# EAGLE board atto84-Panel (EAGLE 7.7.0), part 1 of 2
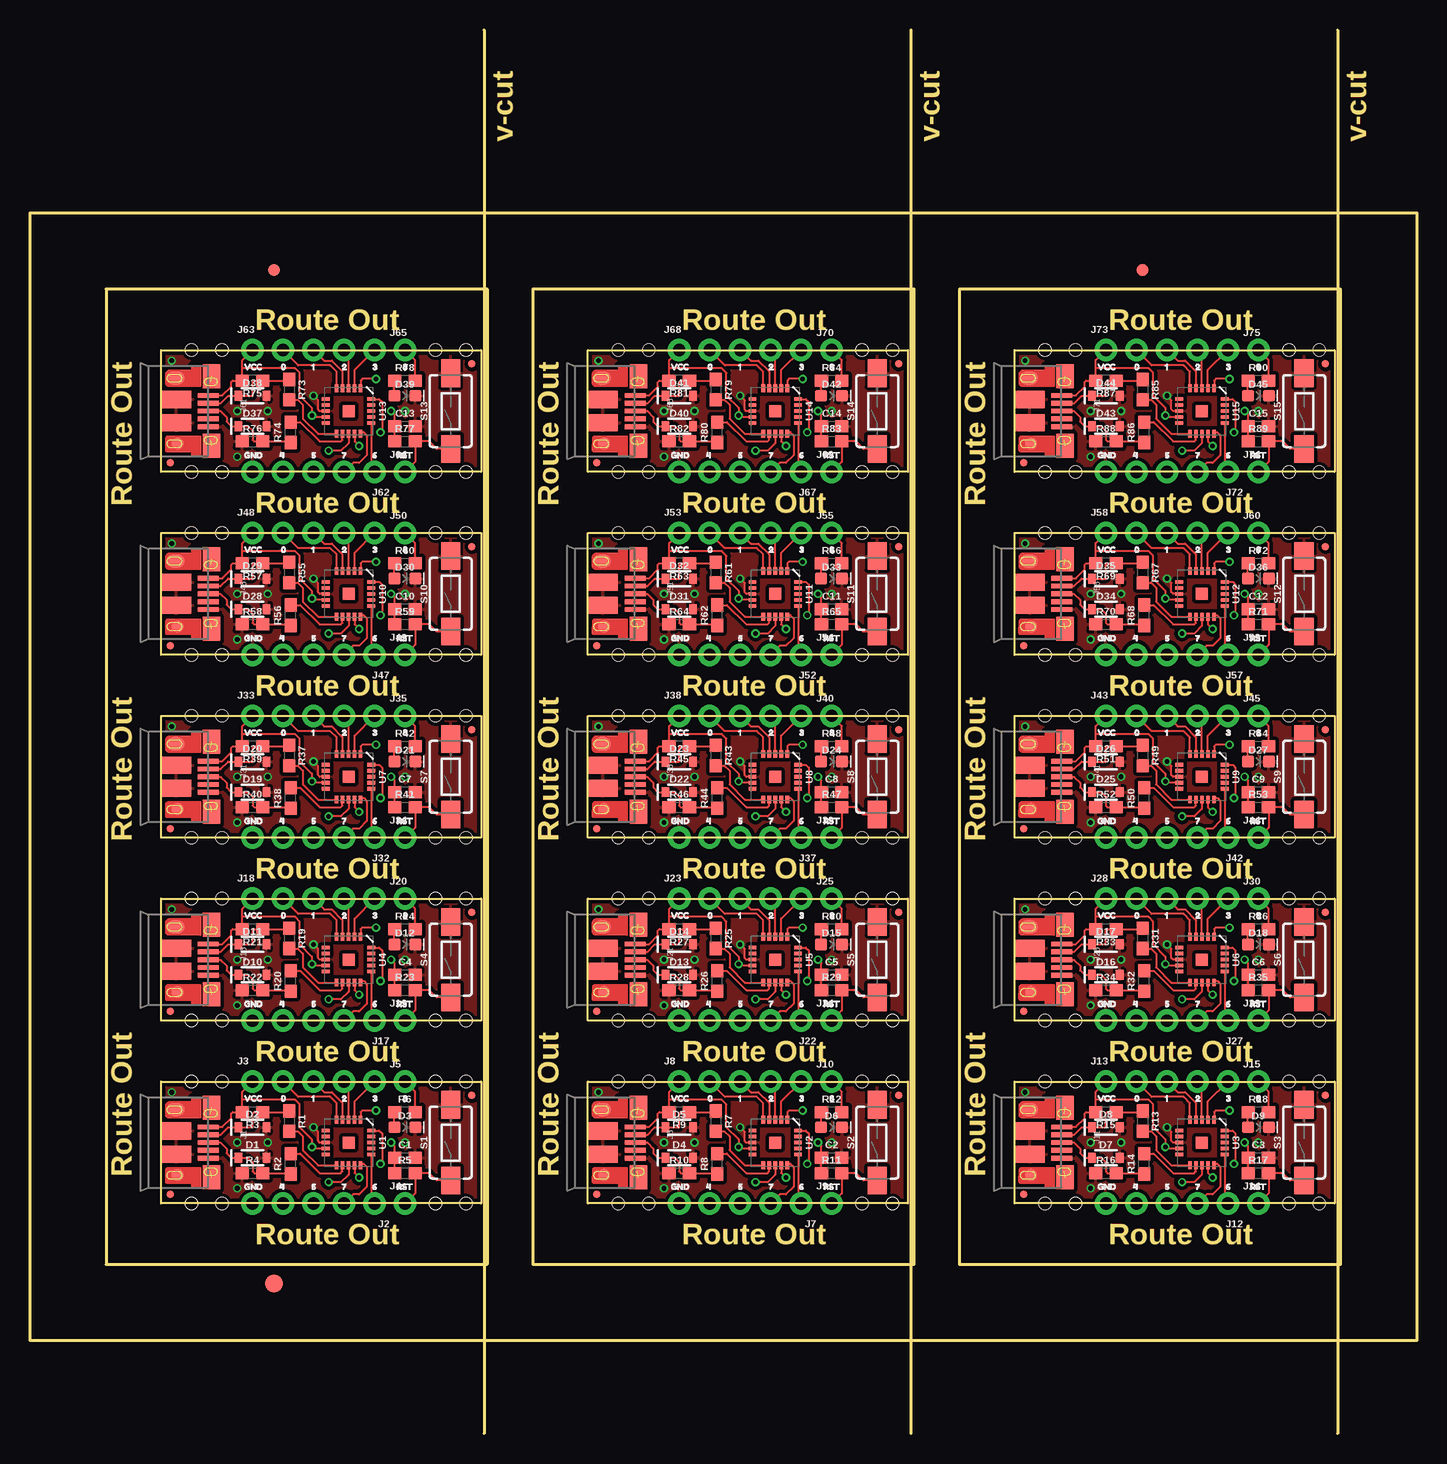
[diagram p0: board, top side]
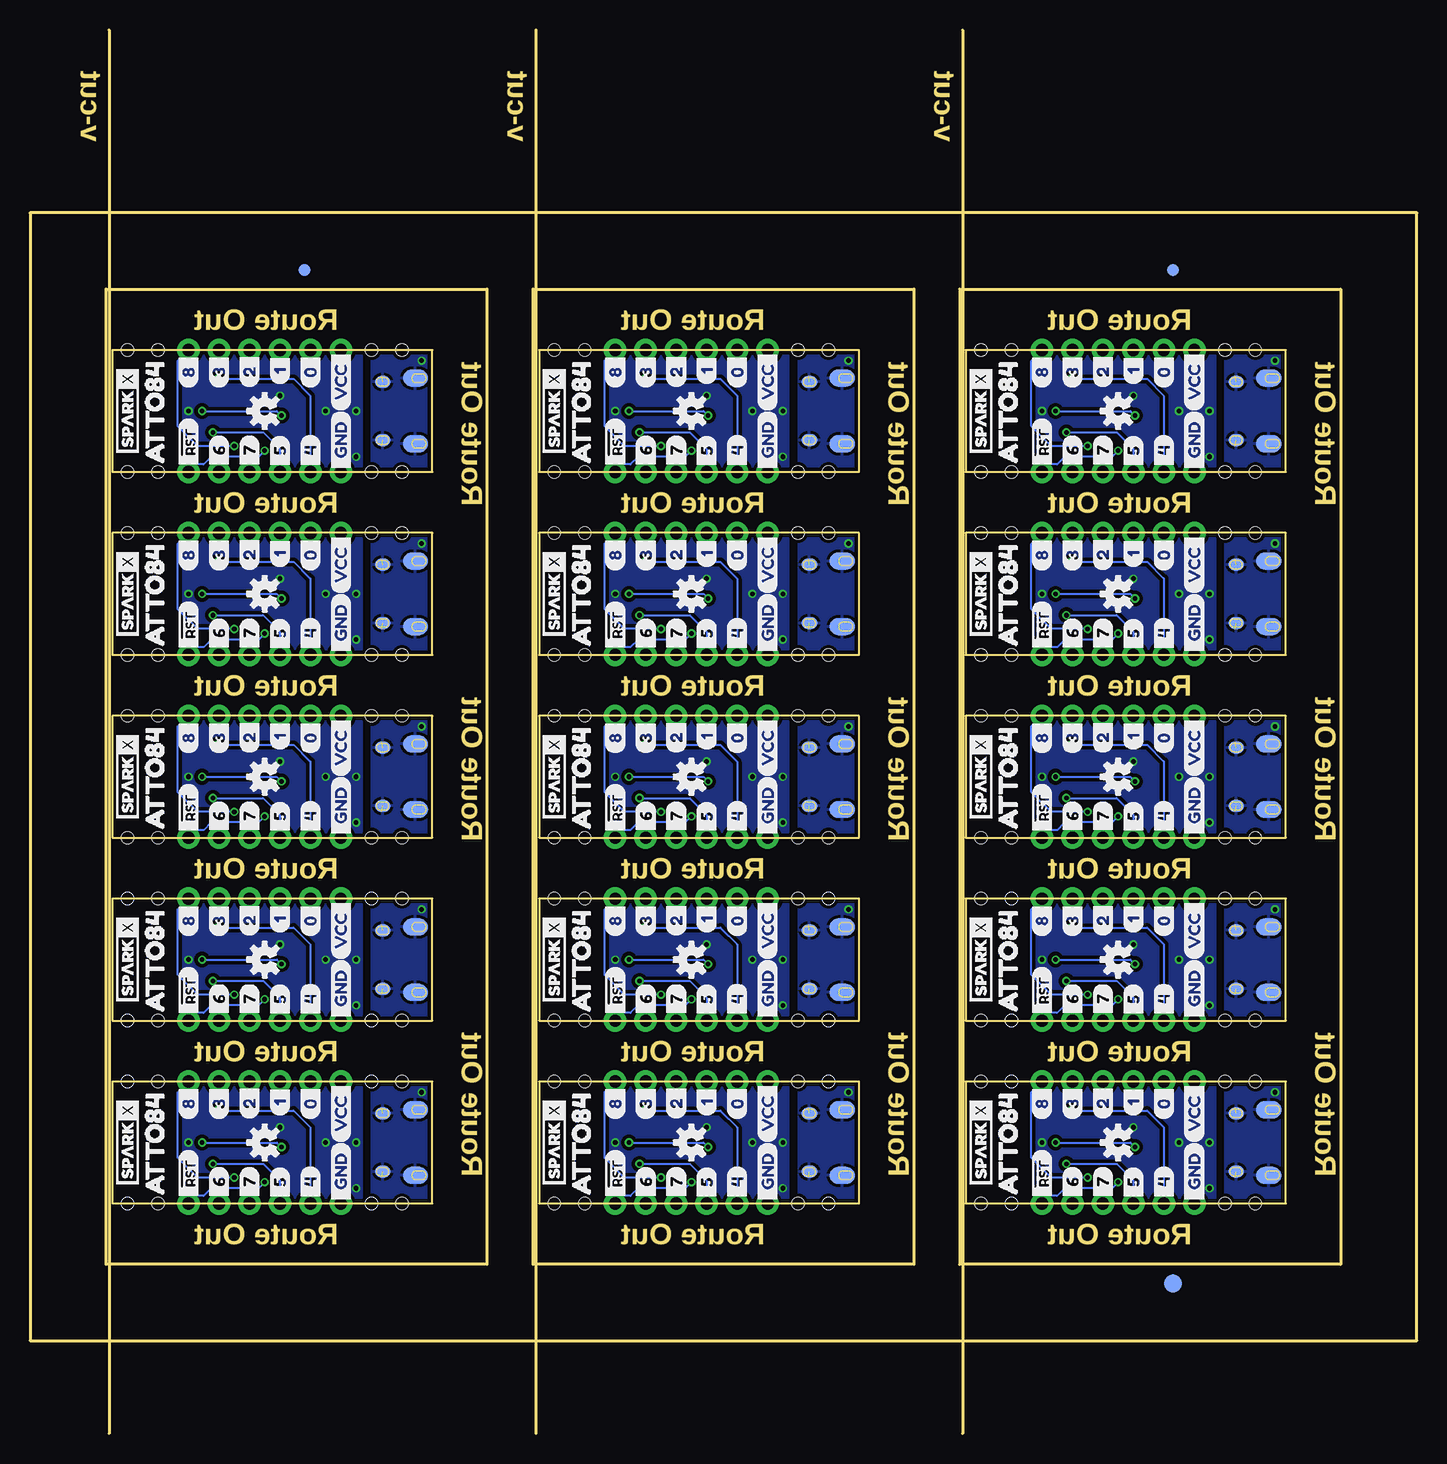
[diagram p1: board, bottom side, seen from below]

Size 115.57 x 116.97 mm. Coordinates in mm from the lower left corner, seen from the top.
Outline: 37.85,116.97 37.85,0
Outline: 73.41,116.97 73.41,0
Outline: 108.97,116.97 108.97,0
Outline: 10.92,19.18 10.92,29.34 37.59,29.34 37.59,19.18 10.92,19.18
Outline: 46.48,19.18 46.48,29.34 73.15,29.34 73.15,19.18 46.48,19.18
Outline: 82.04,19.18 82.04,29.34 108.71,29.34 108.71,19.18 82.04,19.18
Outline: 10.92,34.42 10.92,44.58 37.59,44.58 37.59,34.42 10.92,34.42
Outline: 46.48,34.42 46.48,44.58 73.15,44.58 73.15,34.42 46.48,34.42
Outline: 82.04,34.42 82.04,44.58 108.71,44.58 108.71,34.42 82.04,34.42
Outline: 10.92,49.66 10.92,59.82 37.59,59.82 37.59,49.66 10.92,49.66
Outline: 46.48,49.66 46.48,59.82 73.15,59.82 73.15,49.66 46.48,49.66
Outline: 82.04,49.66 82.04,59.82 108.71,59.82 108.71,49.66 82.04,49.66
Outline: 10.92,64.9 10.92,75.06 37.59,75.06 37.59,64.9 10.92,64.9
Outline: 46.48,64.9 46.48,75.06 73.15,75.06 73.15,64.9 46.48,64.9
Outline: 82.04,64.9 82.04,75.06 108.71,75.06 108.71,64.9 82.04,64.9
Outline: 10.92,80.14 10.92,90.3 37.59,90.3 37.59,80.14 10.92,80.14
Outline: 46.48,80.14 46.48,90.3 73.15,90.3 73.15,80.14 46.48,80.14
Outline: 82.04,80.14 82.04,90.3 108.71,90.3 108.71,80.14 82.04,80.14
Outline: 6.35,14.1 38.1,14.1 38.1,95.38 6.35,95.38 6.35,14.1
Outline: 41.91,14.1 73.66,14.1 73.66,95.38 41.91,95.38 41.91,14.1
Outline: 77.47,14.1 109.22,14.1 109.22,95.38 77.47,95.38 77.47,14.1
Outline: 115.57,7.75 0,7.75 0,101.73 115.57,101.73 115.57,7.75
Copper layers (1*16): Top 0.035mm / dielectric 1.5mm / Bottom 0.035mm
Design rules "SparkFun-2-layer-PCBWay-LIMIT": minimum track width 6mil, minimum drill 0.3mm, track to track 6mil, track to pad 6mil, pad to pad 6mil, via to via 6mil, smd to smd 6mil, copper to edge 6mil, drill to drill 6mil, minimum pad ring 6mil, minimum via ring 6mil, stop-mask expansion 4mil, vias tented up to drill 25mil, thermal gap 10mil
Holes 1.02 mm at 16,29.34 13.46,29.34 13.46,19.18 16,19.18 33.78,19.18 36.32,19.18 36.32,29.34 33.78,29.34 51.56,29.34 49.02,29.34 49.02,19.18 51.56,19.18 69.34,19.18 71.88,19.18 71.88,29.34 69.34,29.34 87.12,29.34 84.58,29.34 84.58,19.18 87.12,19.18 104.9,19.18 107.44,19.18 107.44,29.34 104.9,29.34 16,44.58 13.46,44.58 13.46,34.42 16,34.42 33.78,34.42 36.32,34.42 36.32,44.58 33.78,44.58 51.56,44.58 49.02,44.58 49.02,34.42 51.56,34.42 69.34,34.42 71.88,34.42 71.88,44.58 69.34,44.58 87.12,44.58 84.58,44.58 84.58,34.42 87.12,34.42 104.9,34.42 107.44,34.42 107.44,44.58 104.9,44.58 16,59.82 13.46,59.82 13.46,49.66 16,49.66 33.78,49.66 36.32,49.66 36.32,59.82 33.78,59.82 51.56,59.82 49.02,59.82 49.02,49.66 51.56,49.66 69.34,49.66 71.88,49.66 71.88,59.82 69.34,59.82 87.12,59.82 84.58,59.82 84.58,49.66 87.12,49.66 104.9,49.66 107.44,49.66 107.44,59.82 104.9,59.82 16,75.06 13.46,75.06 13.46,64.9 16,64.9 33.78,64.9 36.32,64.9 36.32,75.06 33.78,75.06 51.56,75.06 49.02,75.06 49.02,64.9 51.56,64.9 69.34,64.9 71.88,64.9 71.88,75.06 69.34,75.06 87.12,75.06 84.58,75.06 84.58,64.9 87.12,64.9 104.9,64.9 107.44,64.9 107.44,75.06 104.9,75.06 16,90.3 13.46,90.3 13.46,80.14 16,80.14 33.78,80.14 36.32,80.14 36.32,90.3 33.78,90.3 51.56,90.3 49.02,90.3 49.02,80.14 51.56,80.14 69.34,80.14 71.88,80.14 71.88,90.3 69.34,90.3 87.12,90.3 84.58,90.3 84.58,80.14 87.12,80.14 104.9,80.14 107.44,80.14 107.44,90.3 104.9,90.3

## Footprints (pad centres in the part's own frame; a part is rotated, then mirrored left to right if it is on the bottom)
0603 = smd 1.1 x 1: 1 -0.85,0; 2 0.85,0
SOD-323 = smd 0.63 x 0.83: A 1.15,0; C -1.15,0
LED-0603 = smd 1 x 1: A -0.877,0; C 0.877,0
FIDUCIAL-1X2 = smd 1 x 1: 1 0,0
FIDUCIAL-1.5X3 = smd 1.5 x 1.5: 1 0,0
FIDUCIAL-MICRO = smd 0.635 x 0.635: 1 0,0
USB-MICROB-PTH-MILL = smd 0.4 x 1.75: D+ 0,0; D- -0.65,0; GND 1.3,0; ID 0.65,0; VBUS -1.3,0 | smd 2 x 1.46: SHIELD -2.9,0.275; SHIELD2 2.9,0.275 | smd 1.425 x 2.5: SHIELD3 -0.963,-2.675; SHIELD4 0.963,-2.675 | smd 1.4 x 2.1 bottom: SHIELD5 -2.731,-2.531; SHIELD7 2.729,-2.531 | smd 1 x 1: SHIELD6 2.7,-2.575 | smd 1.1 x 1.5: SHIELD8 -2.731,-2.731 | smd 1 x 1.3 bottom: SHIELD9 -2.43,0.195; SHIELD10 2.43,0.195
1X05_NO_SILK = drill 1.016 pad 1.88: 1 0,0; 2 2.54,0; 3 5.08,0; 4 7.62,0; 5 10.16,0
1X01_NO_SILK = drill 1.016 pad 1.88: 1 0,0
TACTILE_SWITCH_SMD_6.0X3.5MM = smd 2.3 x 1.6: 1 -3.15,0; 2 3.15,0
QFN20 = smd 1 x 1: 0 0,0 | smd 0.65 x 0.3: 1 -1.9,1; 2 -1.9,0.5; 3 -1.9,0; 4 -1.9,-0.5; 5 -1.9,-1; 11 1.9,-1; 12 1.9,-0.5; 13 1.9,0; 14 1.9,0.5; 15 1.9,1 | smd 0.3 x 0.65: 6 -1,-1.9; 7 -0.5,-1.9; 8 0,-1.9; 9 0.5,-1.9; 10 1,-1.9; 16 1,1.9; 17 0.5,1.9; 18 0,1.9; 19 -0.5,1.9; 20 -1,1.9

## Placement (x,y rotation side)
C1  0.1uF  [0603]  31.24,22.99 0 top
C2  0.1uF  [0603]  66.8,22.99 0 top
C3  0.1uF  [0603]  102.36,22.99 0 top
C4  0.1uF  [0603]  31.24,38.23 0 top
C5  0.1uF  [0603]  66.8,38.23 0 top
C6  0.1uF  [0603]  102.36,38.23 0 top
C7  0.1uF  [0603]  31.24,53.47 0 top
C8  0.1uF  [0603]  66.8,53.47 0 top
C9  0.1uF  [0603]  102.36,53.47 0 top
C10  0.1uF  [0603]  31.24,68.71 0 top
C11  0.1uF  [0603]  66.8,68.71 0 top
C12  0.1uF  [0603]  102.36,68.71 0 top
C13  0.1uF  [0603]  31.24,83.95 0 top
C14  0.1uF  [0603]  66.8,83.95 0 top
C15  0.1uF  [0603]  102.36,83.95 0 top
D1  3.6V  [SOD-323]  18.54,22.99 0 top
D2  3.6V  [SOD-323]  18.54,25.53 0 top
D3  BLUE  [LED-0603]  31.24,25.53 0 top
D4  3.6V  [SOD-323]  54.1,22.99 0 top
D5  3.6V  [SOD-323]  54.1,25.53 0 top
D6  BLUE  [LED-0603]  66.8,25.53 0 top
D7  3.6V  [SOD-323]  89.66,22.99 0 top
D8  3.6V  [SOD-323]  89.66,25.53 0 top
D9  BLUE  [LED-0603]  102.36,25.53 0 top
D10  3.6V  [SOD-323]  18.54,38.23 0 top
D11  3.6V  [SOD-323]  18.54,40.77 0 top
D12  BLUE  [LED-0603]  31.24,40.77 0 top
D13  3.6V  [SOD-323]  54.1,38.23 0 top
D14  3.6V  [SOD-323]  54.1,40.77 0 top
D15  BLUE  [LED-0603]  66.8,40.77 0 top
D16  3.6V  [SOD-323]  89.66,38.23 0 top
D17  3.6V  [SOD-323]  89.66,40.77 0 top
D18  BLUE  [LED-0603]  102.36,40.77 0 top
D19  3.6V  [SOD-323]  18.54,53.47 0 top
D20  3.6V  [SOD-323]  18.54,56.01 0 top
D21  BLUE  [LED-0603]  31.24,56.01 0 top
D22  3.6V  [SOD-323]  54.1,53.47 0 top
D23  3.6V  [SOD-323]  54.1,56.01 0 top
D24  BLUE  [LED-0603]  66.8,56.01 0 top
D25  3.6V  [SOD-323]  89.66,53.47 0 top
D26  3.6V  [SOD-323]  89.66,56.01 0 top
D27  BLUE  [LED-0603]  102.36,56.01 0 top
D28  3.6V  [SOD-323]  18.54,68.71 0 top
D29  3.6V  [SOD-323]  18.54,71.25 0 top
D30  BLUE  [LED-0603]  31.24,71.25 0 top
D31  3.6V  [SOD-323]  54.1,68.71 0 top
D32  3.6V  [SOD-323]  54.1,71.25 0 top
D33  BLUE  [LED-0603]  66.8,71.25 0 top
D34  3.6V  [SOD-323]  89.66,68.71 0 top
D35  3.6V  [SOD-323]  89.66,71.25 0 top
D36  BLUE  [LED-0603]  102.36,71.25 0 top
D37  3.6V  [SOD-323]  18.54,83.95 0 top
D38  3.6V  [SOD-323]  18.54,86.49 0 top
D39  BLUE  [LED-0603]  31.24,86.49 0 top
D40  3.6V  [SOD-323]  54.1,83.95 0 top
D41  3.6V  [SOD-323]  54.1,86.49 0 top
D42  BLUE  [LED-0603]  66.8,86.49 0 top
D43  3.6V  [SOD-323]  89.66,83.95 0 top
D44  3.6V  [SOD-323]  89.66,86.49 0 top
D45  BLUE  [LED-0603]  102.36,86.49 0 top
E$1  [FIDUCIAL-1X2]  20.32,96.96 0 top
E$2  [FIDUCIAL-1X2]  20.32,96.96 0 bottom
E$3  [FIDUCIAL-1X2]  92.71,96.96 0 top
E$4  [FIDUCIAL-1X2]  92.71,96.96 0 bottom
E$5  [FIDUCIAL-1.5X3]  20.32,12.51 0 top
E$6  [FIDUCIAL-1.5X3]  20.32,12.51 0 bottom
FD1  FIDUCIALUFIDUCIAL  [FIDUCIAL-MICRO]  36.83,28.19 0 top
FD2  FIDUCIALUFIDUCIAL  [FIDUCIAL-MICRO]  11.68,19.94 0 top
FD3  FIDUCIALUFIDUCIAL  [FIDUCIAL-MICRO]  72.39,28.19 0 top
FD4  FIDUCIALUFIDUCIAL  [FIDUCIAL-MICRO]  47.24,19.94 0 top
FD5  FIDUCIALUFIDUCIAL  [FIDUCIAL-MICRO]  107.95,28.19 0 top
FD6  FIDUCIALUFIDUCIAL  [FIDUCIAL-MICRO]  82.8,19.94 0 top
FD7  FIDUCIALUFIDUCIAL  [FIDUCIAL-MICRO]  36.83,43.43 0 top
FD8  FIDUCIALUFIDUCIAL  [FIDUCIAL-MICRO]  11.68,35.18 0 top
FD9  FIDUCIALUFIDUCIAL  [FIDUCIAL-MICRO]  72.39,43.43 0 top
FD10  FIDUCIALUFIDUCIAL  [FIDUCIAL-MICRO]  47.24,35.18 0 top
FD11  FIDUCIALUFIDUCIAL  [FIDUCIAL-MICRO]  107.95,43.43 0 top
FD12  FIDUCIALUFIDUCIAL  [FIDUCIAL-MICRO]  82.8,35.18 0 top
FD13  FIDUCIALUFIDUCIAL  [FIDUCIAL-MICRO]  36.83,58.67 0 top
FD14  FIDUCIALUFIDUCIAL  [FIDUCIAL-MICRO]  11.68,50.42 0 top
FD15  FIDUCIALUFIDUCIAL  [FIDUCIAL-MICRO]  72.39,58.67 0 top
FD16  FIDUCIALUFIDUCIAL  [FIDUCIAL-MICRO]  47.24,50.42 0 top
FD17  FIDUCIALUFIDUCIAL  [FIDUCIAL-MICRO]  107.95,58.67 0 top
FD18  FIDUCIALUFIDUCIAL  [FIDUCIAL-MICRO]  82.8,50.42 0 top
FD19  FIDUCIALUFIDUCIAL  [FIDUCIAL-MICRO]  36.83,73.91 0 top
FD20  FIDUCIALUFIDUCIAL  [FIDUCIAL-MICRO]  11.68,65.66 0 top
FD21  FIDUCIALUFIDUCIAL  [FIDUCIAL-MICRO]  72.39,73.91 0 top
FD22  FIDUCIALUFIDUCIAL  [FIDUCIAL-MICRO]  47.24,65.66 0 top
FD23  FIDUCIALUFIDUCIAL  [FIDUCIAL-MICRO]  107.95,73.91 0 top
FD24  FIDUCIALUFIDUCIAL  [FIDUCIAL-MICRO]  82.8,65.66 0 top
FD25  FIDUCIALUFIDUCIAL  [FIDUCIAL-MICRO]  36.83,89.15 0 top
FD26  FIDUCIALUFIDUCIAL  [FIDUCIAL-MICRO]  11.68,80.9 0 top
FD27  FIDUCIALUFIDUCIAL  [FIDUCIAL-MICRO]  72.39,89.15 0 top
FD28  FIDUCIALUFIDUCIAL  [FIDUCIAL-MICRO]  47.24,80.9 0 top
FD29  FIDUCIALUFIDUCIAL  [FIDUCIAL-MICRO]  107.95,89.15 0 top
FD30  FIDUCIALUFIDUCIAL  [FIDUCIAL-MICRO]  82.8,80.9 0 top
J1  [USB-MICROB-PTH-MILL]  14.86,24.26 270 top
J2  [1X05_NO_SILK]  28.7,19.18 180 top
J3  [1X05_NO_SILK]  18.54,29.34 0 top
J4  [1X01_NO_SILK]  31.24,19.18 0 top
J5  [1X01_NO_SILK]  31.24,29.34 0 top
J6  [USB-MICROB-PTH-MILL]  50.42,24.26 270 top
J7  [1X05_NO_SILK]  64.26,19.18 180 top
J8  [1X05_NO_SILK]  54.1,29.34 0 top
J9  [1X01_NO_SILK]  66.8,19.18 0 top
J10  [1X01_NO_SILK]  66.8,29.34 0 top
J11  [USB-MICROB-PTH-MILL]  85.98,24.26 270 top
J12  [1X05_NO_SILK]  99.82,19.18 180 top
J13  [1X05_NO_SILK]  89.66,29.34 0 top
J14  [1X01_NO_SILK]  102.36,19.18 0 top
J15  [1X01_NO_SILK]  102.36,29.34 0 top
J16  [USB-MICROB-PTH-MILL]  14.86,39.5 270 top
J17  [1X05_NO_SILK]  28.7,34.42 180 top
J18  [1X05_NO_SILK]  18.54,44.58 0 top
J19  [1X01_NO_SILK]  31.24,34.42 0 top
J20  [1X01_NO_SILK]  31.24,44.58 0 top
J21  [USB-MICROB-PTH-MILL]  50.42,39.5 270 top
J22  [1X05_NO_SILK]  64.26,34.42 180 top
J23  [1X05_NO_SILK]  54.1,44.58 0 top
J24  [1X01_NO_SILK]  66.8,34.42 0 top
J25  [1X01_NO_SILK]  66.8,44.58 0 top
J26  [USB-MICROB-PTH-MILL]  85.98,39.5 270 top
J27  [1X05_NO_SILK]  99.82,34.42 180 top
J28  [1X05_NO_SILK]  89.66,44.58 0 top
J29  [1X01_NO_SILK]  102.36,34.42 0 top
J30  [1X01_NO_SILK]  102.36,44.58 0 top
J31  [USB-MICROB-PTH-MILL]  14.86,54.74 270 top
J32  [1X05_NO_SILK]  28.7,49.66 180 top
J33  [1X05_NO_SILK]  18.54,59.82 0 top
J34  [1X01_NO_SILK]  31.24,49.66 0 top
J35  [1X01_NO_SILK]  31.24,59.82 0 top
J36  [USB-MICROB-PTH-MILL]  50.42,54.74 270 top
J37  [1X05_NO_SILK]  64.26,49.66 180 top
J38  [1X05_NO_SILK]  54.1,59.82 0 top
J39  [1X01_NO_SILK]  66.8,49.66 0 top
J40  [1X01_NO_SILK]  66.8,59.82 0 top
J41  [USB-MICROB-PTH-MILL]  85.98,54.74 270 top
J42  [1X05_NO_SILK]  99.82,49.66 180 top
J43  [1X05_NO_SILK]  89.66,59.82 0 top
J44  [1X01_NO_SILK]  102.36,49.66 0 top
J45  [1X01_NO_SILK]  102.36,59.82 0 top
J46  [USB-MICROB-PTH-MILL]  14.86,69.98 270 top
J47  [1X05_NO_SILK]  28.7,64.9 180 top
J48  [1X05_NO_SILK]  18.54,75.06 0 top
J49  [1X01_NO_SILK]  31.24,64.9 0 top
J50  [1X01_NO_SILK]  31.24,75.06 0 top
J51  [USB-MICROB-PTH-MILL]  50.42,69.98 270 top
J52  [1X05_NO_SILK]  64.26,64.9 180 top
J53  [1X05_NO_SILK]  54.1,75.06 0 top
J54  [1X01_NO_SILK]  66.8,64.9 0 top
J55  [1X01_NO_SILK]  66.8,75.06 0 top
J56  [USB-MICROB-PTH-MILL]  85.98,69.98 270 top
J57  [1X05_NO_SILK]  99.82,64.9 180 top
J58  [1X05_NO_SILK]  89.66,75.06 0 top
J59  [1X01_NO_SILK]  102.36,64.9 0 top
J60  [1X01_NO_SILK]  102.36,75.06 0 top
J61  [USB-MICROB-PTH-MILL]  14.86,85.22 270 top
J62  [1X05_NO_SILK]  28.7,80.14 180 top
J63  [1X05_NO_SILK]  18.54,90.3 0 top
J64  [1X01_NO_SILK]  31.24,80.14 0 top
J65  [1X01_NO_SILK]  31.24,90.3 0 top
J66  [USB-MICROB-PTH-MILL]  50.42,85.22 270 top
J67  [1X05_NO_SILK]  64.26,80.14 180 top
J68  [1X05_NO_SILK]  54.1,90.3 0 top
J69  [1X01_NO_SILK]  66.8,80.14 0 top
J70  [1X01_NO_SILK]  66.8,90.3 0 top
J71  [USB-MICROB-PTH-MILL]  85.98,85.22 270 top
J72  [1X05_NO_SILK]  99.82,80.14 180 top
J73  [1X05_NO_SILK]  89.66,90.3 0 top
J74  [1X01_NO_SILK]  102.36,80.14 0 top
J75  [1X01_NO_SILK]  102.36,90.3 0 top
R1  68OHM-0603-1/10W-1%  [0603]  21.59,26.04 270 top
R2  68OHM-0603-1/10W-1%  [0603]  21.72,22.48 90 top
R3  1.5k  [0603]  18.54,26.8 180 top
R4  1M  [0603]  18.54,21.72 0 top
R5  10k  [0603]  31.24,21.72 0 top
R6  1k  [0603]  31.24,26.8 0 top
R7  68OHM-0603-1/10W-1%  [0603]  57.15,26.04 270 top
R8  68OHM-0603-1/10W-1%  [0603]  57.28,22.48 90 top
R9  1.5k  [0603]  54.1,26.8 180 top
R10  1M  [0603]  54.1,21.72 0 top
R11  10k  [0603]  66.8,21.72 0 top
R12  1k  [0603]  66.8,26.8 0 top
R13  68OHM-0603-1/10W-1%  [0603]  92.71,26.04 270 top
R14  68OHM-0603-1/10W-1%  [0603]  92.84,22.48 90 top
R15  1.5k  [0603]  89.66,26.8 180 top
R16  1M  [0603]  89.66,21.72 0 top
R17  10k  [0603]  102.36,21.72 0 top
R18  1k  [0603]  102.36,26.8 0 top
R19  68OHM-0603-1/10W-1%  [0603]  21.59,41.27 270 top
R20  68OHM-0603-1/10W-1%  [0603]  21.72,37.72 90 top
R21  1.5k  [0603]  18.54,42.04 180 top
R22  1M  [0603]  18.54,36.96 0 top
R23  10k  [0603]  31.24,36.96 0 top
R24  1k  [0603]  31.24,42.04 0 top
R25  68OHM-0603-1/10W-1%  [0603]  57.15,41.27 270 top
R26  68OHM-0603-1/10W-1%  [0603]  57.28,37.72 90 top
R27  1.5k  [0603]  54.1,42.04 180 top
R28  1M  [0603]  54.1,36.96 0 top
R29  10k  [0603]  66.8,36.96 0 top
R30  1k  [0603]  66.8,42.04 0 top
R31  68OHM-0603-1/10W-1%  [0603]  92.71,41.27 270 top
R32  68OHM-0603-1/10W-1%  [0603]  92.84,37.72 90 top
R33  1.5k  [0603]  89.66,42.04 180 top
R34  1M  [0603]  89.66,36.96 0 top
R35  10k  [0603]  102.36,36.96 0 top
R36  1k  [0603]  102.36,42.04 0 top
R37  68OHM-0603-1/10W-1%  [0603]  21.59,56.52 270 top
R38  68OHM-0603-1/10W-1%  [0603]  21.72,52.96 90 top
R39  1.5k  [0603]  18.54,57.28 180 top
R40  1M  [0603]  18.54,52.2 0 top
R41  10k  [0603]  31.24,52.2 0 top
R42  1k  [0603]  31.24,57.28 0 top
R43  68OHM-0603-1/10W-1%  [0603]  57.15,56.52 270 top
R44  68OHM-0603-1/10W-1%  [0603]  57.28,52.96 90 top
R45  1.5k  [0603]  54.1,57.28 180 top
R46  1M  [0603]  54.1,52.2 0 top
R47  10k  [0603]  66.8,52.2 0 top
R48  1k  [0603]  66.8,57.28 0 top
R49  68OHM-0603-1/10W-1%  [0603]  92.71,56.52 270 top
R50  68OHM-0603-1/10W-1%  [0603]  92.84,52.96 90 top
R51  1.5k  [0603]  89.66,57.28 180 top
R52  1M  [0603]  89.66,52.2 0 top
R53  10k  [0603]  102.36,52.2 0 top
R54  1k  [0603]  102.36,57.28 0 top
R55  68OHM-0603-1/10W-1%  [0603]  21.59,71.75 270 top
R56  68OHM-0603-1/10W-1%  [0603]  21.72,68.2 90 top
R57  1.5k  [0603]  18.54,72.52 180 top
R58  1M  [0603]  18.54,67.44 0 top
R59  10k  [0603]  31.24,67.44 0 top
R60  1k  [0603]  31.24,72.52 0 top
R61  68OHM-0603-1/10W-1%  [0603]  57.15,71.75 270 top
R62  68OHM-0603-1/10W-1%  [0603]  57.28,68.2 90 top
R63  1.5k  [0603]  54.1,72.52 180 top
R64  1M  [0603]  54.1,67.44 0 top
R65  10k  [0603]  66.8,67.44 0 top
R66  1k  [0603]  66.8,72.52 0 top
R67  68OHM-0603-1/10W-1%  [0603]  92.71,71.75 270 top
R68  68OHM-0603-1/10W-1%  [0603]  92.84,68.2 90 top
R69  1.5k  [0603]  89.66,72.52 180 top
R70  1M  [0603]  89.66,67.44 0 top
R71  10k  [0603]  102.36,67.44 0 top
R72  1k  [0603]  102.36,72.52 0 top
R73  68OHM-0603-1/10W-1%  [0603]  21.59,87 270 top
R74  68OHM-0603-1/10W-1%  [0603]  21.72,83.44 90 top
R75  1.5k  [0603]  18.54,87.76 180 top
R76  1M  [0603]  18.54,82.68 0 top
R77  10k  [0603]  31.24,82.68 0 top
R78  1k  [0603]  31.24,87.76 0 top
R79  68OHM-0603-1/10W-1%  [0603]  57.15,87 270 top
R80  68OHM-0603-1/10W-1%  [0603]  57.28,83.44 90 top
R81  1.5k  [0603]  54.1,87.76 180 top
R82  1M  [0603]  54.1,82.68 0 top
R83  10k  [0603]  66.8,82.68 0 top
R84  1k  [0603]  66.8,87.76 0 top
R85  68OHM-0603-1/10W-1%  [0603]  92.71,87 270 top
R86  68OHM-0603-1/10W-1%  [0603]  92.84,83.44 90 top
R87  1.5k  [0603]  89.66,87.76 180 top
R88  1M  [0603]  89.66,82.68 0 top
R89  10k  [0603]  102.36,82.68 0 top
R90  1k  [0603]  102.36,87.76 0 top
S1  [TACTILE_SWITCH_SMD_6.0X3.5MM]  35.05,24.26 90 top
S2  [TACTILE_SWITCH_SMD_6.0X3.5MM]  70.61,24.26 90 top
S3  [TACTILE_SWITCH_SMD_6.0X3.5MM]  106.17,24.26 90 top
S4  [TACTILE_SWITCH_SMD_6.0X3.5MM]  35.05,39.5 90 top
S5  [TACTILE_SWITCH_SMD_6.0X3.5MM]  70.61,39.5 90 top
S6  [TACTILE_SWITCH_SMD_6.0X3.5MM]  106.17,39.5 90 top
S7  [TACTILE_SWITCH_SMD_6.0X3.5MM]  35.05,54.74 90 top
S8  [TACTILE_SWITCH_SMD_6.0X3.5MM]  70.61,54.74 90 top
S9  [TACTILE_SWITCH_SMD_6.0X3.5MM]  106.17,54.74 90 top
S10  [TACTILE_SWITCH_SMD_6.0X3.5MM]  35.05,69.98 90 top
S11  [TACTILE_SWITCH_SMD_6.0X3.5MM]  70.61,69.98 90 top
S12  [TACTILE_SWITCH_SMD_6.0X3.5MM]  106.17,69.98 90 top
S13  [TACTILE_SWITCH_SMD_6.0X3.5MM]  35.05,85.22 90 top
S14  [TACTILE_SWITCH_SMD_6.0X3.5MM]  70.61,85.22 90 top
S15  [TACTILE_SWITCH_SMD_6.0X3.5MM]  106.17,85.22 90 top
U1  ATTINY84ATTINY84-20MU  [QFN20]  26.54,24.26 270 top
U2  ATTINY84ATTINY84-20MU  [QFN20]  62.1,24.26 270 top
U3  ATTINY84ATTINY84-20MU  [QFN20]  97.66,24.26 270 top
U4  ATTINY84ATTINY84-20MU  [QFN20]  26.54,39.5 270 top
U5  ATTINY84ATTINY84-20MU  [QFN20]  62.1,39.5 270 top
U6  ATTINY84ATTINY84-20MU  [QFN20]  97.66,39.5 270 top
U7  ATTINY84ATTINY84-20MU  [QFN20]  26.54,54.74 270 top
U8  ATTINY84ATTINY84-20MU  [QFN20]  62.1,54.74 270 top
U9  ATTINY84ATTINY84-20MU  [QFN20]  97.66,54.74 270 top
U10  ATTINY84ATTINY84-20MU  [QFN20]  26.54,69.98 270 top
U11  ATTINY84ATTINY84-20MU  [QFN20]  62.1,69.98 270 top
U12  ATTINY84ATTINY84-20MU  [QFN20]  97.66,69.98 270 top
U13  ATTINY84ATTINY84-20MU  [QFN20]  26.54,85.22 270 top
U14  ATTINY84ATTINY84-20MU  [QFN20]  62.1,85.22 270 top
U15  ATTINY84ATTINY84-20MU  [QFN20]  97.66,85.22 270 top
U$1  [00]  20.45,27.94 0 top
U$2  [11]  22.99,27.94 0 top
U$3  [22]  25.53,27.94 0 top
U$4  [33]  28.07,27.94 0 top
U$5  [44]  20.32,20.57 0 top
U$6  [55]  22.99,20.57 0 top
U$7  [66]  28.07,20.57 0 top
U$8  [77]  25.53,20.57 0 top
U$9  [RST8]  30.1,20.57 0 top
U$10  [VCC10]  17.4,27.94 0 top
U$11  [GND9]  17.4,20.57 0 top
U$12  [81]  30.61,27.94 0 top
U$13  [ATTO8411]  34.07,18.52 90 bottom
U$14  [SPARKX-SMALL]  36.32,24.26 90 bottom
U$15  [_#RST0]  31.24,19.18 90 bottom
U$16  [_42]  21.08,19.3 90 bottom
U$17  [_53]  23.62,19.3 90 bottom
U$18  [_64]  28.7,19.3 90 bottom
U$19  [_75]  26.16,19.3 90 bottom
U$20  [_GND1]  18.54,19.05 90 bottom
U$21  [VCC_5]  18.54,24.26 90 bottom
U$22  [0_4]  21.08,26.16 90 bottom
U$23  [1_3]  23.62,26.42 90 bottom
U$24  [2_2]  26.16,26.16 90 bottom
U$25  [3_1]  28.7,26.16 90 bottom
U$26  [8_0]  31.24,26.16 90 bottom
U$27  [OSHW-LOGO-S]  24.89,24.26 90 bottom
U$28  [00]  56.01,27.94 0 top
U$29  [11]  58.55,27.94 0 top
U$30  [22]  61.09,27.94 0 top
U$31  [33]  63.63,27.94 0 top
U$32  [44]  55.88,20.57 0 top
U$33  [55]  58.55,20.57 0 top
U$34  [66]  63.63,20.57 0 top
U$35  [77]  61.09,20.57 0 top
U$36  [RST8]  65.66,20.57 0 top
U$37  [VCC10]  52.96,27.94 0 top
U$38  [GND9]  52.96,20.57 0 top
U$39  [81]  66.17,27.94 0 top
U$40  [ATTO8411]  69.63,18.52 90 bottom
U$41  [SPARKX-SMALL]  71.88,24.26 90 bottom
U$42  [VCC_5]  54.1,24.26 90 bottom
U$43  [0_4]  56.64,26.16 90 bottom
U$44  [1_3]  59.18,26.42 90 bottom
U$45  [2_2]  61.72,26.16 90 bottom
U$46  [3_1]  64.26,26.16 90 bottom
U$47  [8_0]  66.8,26.16 90 bottom
U$48  [OSHW-LOGO-S]  60.45,24.26 90 bottom
U$49  [_#RST0]  66.8,19.18 90 bottom
U$50  [_42]  56.64,19.3 90 bottom
U$51  [_53]  59.18,19.3 90 bottom
U$52  [_64]  64.26,19.3 90 bottom
U$53  [_75]  61.72,19.3 90 bottom
U$54  [_GND1]  54.1,19.05 90 bottom
U$55  [00]  91.57,27.94 0 top
U$56  [11]  94.11,27.94 0 top
U$57  [22]  96.65,27.94 0 top
U$58  [33]  99.19,27.94 0 top
U$59  [44]  91.44,20.57 0 top
U$60  [55]  94.11,20.57 0 top
U$61  [66]  99.19,20.57 0 top
U$62  [77]  96.65,20.57 0 top
U$63  [RST8]  101.22,20.57 0 top
U$64  [VCC10]  88.52,27.94 0 top
U$65  [GND9]  88.52,20.57 0 top
U$66  [81]  101.73,27.94 0 top
U$67  [ATTO8411]  105.19,18.52 90 bottom
U$68  [SPARKX-SMALL]  107.44,24.26 90 bottom
U$69  [VCC_5]  89.66,24.26 90 bottom
U$70  [0_4]  92.2,26.16 90 bottom
U$71  [1_3]  94.74,26.42 90 bottom
U$72  [2_2]  97.28,26.16 90 bottom
U$73  [3_1]  99.82,26.16 90 bottom
U$74  [8_0]  102.36,26.16 90 bottom
U$75  [OSHW-LOGO-S]  96.01,24.26 90 bottom
U$76  [_#RST0]  102.36,19.18 90 bottom
U$77  [_42]  92.2,19.3 90 bottom
U$78  [_53]  94.74,19.3 90 bottom
U$79  [_64]  99.82,19.3 90 bottom
U$80  [_75]  97.28,19.3 90 bottom
U$81  [_GND1]  89.66,19.05 90 bottom
U$82  [00]  20.45,43.18 0 top
U$83  [11]  22.99,43.18 0 top
U$84  [22]  25.53,43.18 0 top
U$85  [33]  28.07,43.18 0 top
U$86  [44]  20.32,35.81 0 top
U$87  [55]  22.99,35.81 0 top
U$88  [66]  28.07,35.81 0 top
U$89  [77]  25.53,35.81 0 top
U$90  [RST8]  30.1,35.81 0 top
U$91  [VCC10]  17.4,43.18 0 top
U$92  [GND9]  17.4,35.81 0 top
U$93  [81]  30.61,43.18 0 top
U$94  [ATTO8411]  34.07,33.76 90 bottom
U$95  [SPARKX-SMALL]  36.32,39.5 90 bottom
U$96  [VCC_5]  18.54,39.5 90 bottom
U$97  [0_4]  21.08,41.4 90 bottom
U$98  [1_3]  23.62,41.66 90 bottom
U$99  [2_2]  26.16,41.4 90 bottom
U$100  [3_1]  28.7,41.4 90 bottom
U$101  [8_0]  31.24,41.4 90 bottom
U$102  [OSHW-LOGO-S]  24.89,39.5 90 bottom
U$103  [_#RST0]  31.24,34.42 90 bottom
U$104  [_42]  21.08,34.54 90 bottom
U$105  [_53]  23.62,34.54 90 bottom
U$106  [_64]  28.7,34.54 90 bottom
U$107  [_75]  26.16,34.54 90 bottom
U$108  [_GND1]  18.54,34.29 90 bottom
U$109  [00]  56.01,43.18 0 top
U$110  [11]  58.55,43.18 0 top
U$111  [22]  61.09,43.18 0 top
U$112  [33]  63.63,43.18 0 top
U$113  [44]  55.88,35.81 0 top
U$114  [55]  58.55,35.81 0 top
U$115  [66]  63.63,35.81 0 top
U$116  [77]  61.09,35.81 0 top
U$117  [RST8]  65.66,35.81 0 top
U$118  [VCC10]  52.96,43.18 0 top
U$119  [GND9]  52.96,35.81 0 top
U$120  [81]  66.17,43.18 0 top
U$121  [ATTO8411]  69.63,33.76 90 bottom
U$122  [SPARKX-SMALL]  71.88,39.5 90 bottom
U$123  [VCC_5]  54.1,39.5 90 bottom
U$124  [0_4]  56.64,41.4 90 bottom
U$125  [1_3]  59.18,41.66 90 bottom
U$126  [2_2]  61.72,41.4 90 bottom
U$127  [3_1]  64.26,41.4 90 bottom
U$128  [8_0]  66.8,41.4 90 bottom
U$129  [OSHW-LOGO-S]  60.45,39.5 90 bottom
U$130  [_#RST0]  66.8,34.42 90 bottom
U$131  [_42]  56.64,34.54 90 bottom
U$132  [_53]  59.18,34.54 90 bottom
U$133  [_64]  64.26,34.54 90 bottom
U$134  [_75]  61.72,34.54 90 bottom
U$135  [_GND1]  54.1,34.29 90 bottom
U$136  [00]  91.57,43.18 0 top
U$137  [11]  94.11,43.18 0 top
U$138  [22]  96.65,43.18 0 top
U$139  [33]  99.19,43.18 0 top
U$140  [44]  91.44,35.81 0 top
U$141  [55]  94.11,35.81 0 top
U$142  [66]  99.19,35.81 0 top
U$143  [77]  96.65,35.81 0 top
U$144  [RST8]  101.22,35.81 0 top
U$145  [VCC10]  88.52,43.18 0 top
U$146  [GND9]  88.52,35.81 0 top
U$147  [81]  101.73,43.18 0 top
U$148  [ATTO8411]  105.19,33.76 90 bottom
U$149  [SPARKX-SMALL]  107.44,39.5 90 bottom
U$150  [VCC_5]  89.66,39.5 90 bottom
U$151  [0_4]  92.2,41.4 90 bottom
U$152  [1_3]  94.74,41.66 90 bottom
U$153  [2_2]  97.28,41.4 90 bottom
U$154  [3_1]  99.82,41.4 90 bottom
U$155  [8_0]  102.36,41.4 90 bottom
U$156  [OSHW-LOGO-S]  96.01,39.5 90 bottom
U$157  [_#RST0]  102.36,34.42 90 bottom
U$158  [_42]  92.2,34.54 90 bottom
U$159  [_53]  94.74,34.54 90 bottom
U$160  [_64]  99.82,34.54 90 bottom
U$161  [_75]  97.28,34.54 90 bottom
U$162  [_GND1]  89.66,34.29 90 bottom
U$163  [00]  20.45,58.42 0 top
U$164  [11]  22.99,58.42 0 top
U$165  [22]  25.53,58.42 0 top
U$166  [33]  28.07,58.42 0 top
U$167  [44]  20.32,51.05 0 top
U$168  [55]  22.99,51.05 0 top
U$169  [66]  28.07,51.05 0 top
U$170  [77]  25.53,51.05 0 top
U$171  [RST8]  30.1,51.05 0 top
U$172  [VCC10]  17.4,58.42 0 top
U$173  [GND9]  17.4,51.05 0 top
U$174  [81]  30.61,58.42 0 top
U$175  [ATTO8411]  34.07,49 90 bottom
U$176  [SPARKX-SMALL]  36.32,54.74 90 bottom
U$177  [VCC_5]  18.54,54.74 90 bottom
U$178  [0_4]  21.08,56.64 90 bottom
U$179  [1_3]  23.62,56.9 90 bottom
U$180  [2_2]  26.16,56.64 90 bottom
U$181  [3_1]  28.7,56.64 90 bottom
U$182  [8_0]  31.24,56.64 90 bottom
U$183  [OSHW-LOGO-S]  24.89,54.74 90 bottom
U$184  [_#RST0]  31.24,49.66 90 bottom
U$185  [_42]  21.08,49.78 90 bottom
U$186  [_53]  23.62,49.78 90 bottom
U$187  [_64]  28.7,49.78 90 bottom
U$188  [_75]  26.16,49.78 90 bottom
U$189  [_GND1]  18.54,49.53 90 bottom
U$190  [00]  56.01,58.42 0 top
U$191  [11]  58.55,58.42 0 top
U$192  [22]  61.09,58.42 0 top
U$193  [33]  63.63,58.42 0 top
U$194  [44]  55.88,51.05 0 top
U$195  [55]  58.55,51.05 0 top
U$196  [66]  63.63,51.05 0 top
U$197  [77]  61.09,51.05 0 top
U$198  [RST8]  65.66,51.05 0 top
U$199  [VCC10]  52.96,58.42 0 top
U$200  [GND9]  52.96,51.05 0 top
U$201  [81]  66.17,58.42 0 top
U$202  [ATTO8411]  69.63,49 90 bottom
U$203  [SPARKX-SMALL]  71.88,54.74 90 bottom
U$204  [VCC_5]  54.1,54.74 90 bottom
U$205  [0_4]  56.64,56.64 90 bottom
U$206  [1_3]  59.18,56.9 90 bottom
U$207  [2_2]  61.72,56.64 90 bottom
U$208  [3_1]  64.26,56.64 90 bottom
U$209  [8_0]  66.8,56.64 90 bottom
U$210  [OSHW-LOGO-S]  60.45,54.74 90 bottom
U$211  [_#RST0]  66.8,49.66 90 bottom
U$212  [_42]  56.64,49.78 90 bottom
U$213  [_53]  59.18,49.78 90 bottom
U$214  [_64]  64.26,49.78 90 bottom
U$215  [_75]  61.72,49.78 90 bottom
U$216  [_GND1]  54.1,49.53 90 bottom
U$217  [00]  91.57,58.42 0 top
U$218  [11]  94.11,58.42 0 top
U$219  [22]  96.65,58.42 0 top
U$220  [33]  99.19,58.42 0 top
U$221  [44]  91.44,51.05 0 top
U$222  [55]  94.11,51.05 0 top
U$223  [66]  99.19,51.05 0 top
U$224  [77]  96.65,51.05 0 top
U$225  [RST8]  101.22,51.05 0 top
U$226  [VCC10]  88.52,58.42 0 top
U$227  [GND9]  88.52,51.05 0 top
U$228  [81]  101.73,58.42 0 top
U$229  [ATTO8411]  105.19,49 90 bottom
U$230  [SPARKX-SMALL]  107.44,54.74 90 bottom
U$231  [VCC_5]  89.66,54.74 90 bottom
U$232  [0_4]  92.2,56.64 90 bottom
U$233  [1_3]  94.74,56.9 90 bottom
U$234  [2_2]  97.28,56.64 90 bottom
U$235  [3_1]  99.82,56.64 90 bottom
U$236  [8_0]  102.36,56.64 90 bottom
U$237  [OSHW-LOGO-S]  96.01,54.74 90 bottom
U$238  [_#RST0]  102.36,49.66 90 bottom
U$239  [_42]  92.2,49.78 90 bottom
U$240  [_53]  94.74,49.78 90 bottom
U$241  [_64]  99.82,49.78 90 bottom
U$242  [_75]  97.28,49.78 90 bottom
U$243  [_GND1]  89.66,49.53 90 bottom
U$244  [00]  20.45,73.66 0 top
U$245  [11]  22.99,73.66 0 top
U$246  [22]  25.53,73.66 0 top
U$247  [33]  28.07,73.66 0 top
U$248  [44]  20.32,66.29 0 top
U$249  [55]  22.99,66.29 0 top
U$250  [66]  28.07,66.29 0 top
U$251  [77]  25.53,66.29 0 top
U$252  [RST8]  30.1,66.29 0 top
U$253  [VCC10]  17.4,73.66 0 top
U$254  [GND9]  17.4,66.29 0 top
U$255  [81]  30.61,73.66 0 top
U$256  [ATTO8411]  34.07,64.24 90 bottom
U$257  [SPARKX-SMALL]  36.32,69.98 90 bottom
U$258  [VCC_5]  18.54,69.98 90 bottom
U$259  [0_4]  21.08,71.88 90 bottom
U$260  [1_3]  23.62,72.14 90 bottom
U$261  [2_2]  26.16,71.88 90 bottom
U$262  [3_1]  28.7,71.88 90 bottom
U$263  [8_0]  31.24,71.88 90 bottom
U$264  [OSHW-LOGO-S]  24.89,69.98 90 bottom
U$265  [_#RST0]  31.24,64.9 90 bottom
U$266  [_42]  21.08,65.02 90 bottom
U$267  [_53]  23.62,65.02 90 bottom
U$268  [_64]  28.7,65.02 90 bottom
U$269  [_75]  26.16,65.02 90 bottom
U$270  [_GND1]  18.54,64.77 90 bottom
U$271  [00]  56.01,73.66 0 top
U$272  [11]  58.55,73.66 0 top
U$273  [22]  61.09,73.66 0 top
U$274  [33]  63.63,73.66 0 top
U$275  [44]  55.88,66.29 0 top
U$276  [55]  58.55,66.29 0 top
U$277  [66]  63.63,66.29 0 top
U$278  [77]  61.09,66.29 0 top
U$279  [RST8]  65.66,66.29 0 top
U$280  [VCC10]  52.96,73.66 0 top
U$281  [GND9]  52.96,66.29 0 top
U$282  [81]  66.17,73.66 0 top
U$283  [ATTO8411]  69.63,64.24 90 bottom
U$284  [SPARKX-SMALL]  71.88,69.98 90 bottom
U$285  [VCC_5]  54.1,69.98 90 bottom
U$286  [0_4]  56.64,71.88 90 bottom
U$287  [1_3]  59.18,72.14 90 bottom
U$288  [2_2]  61.72,71.88 90 bottom
U$289  [3_1]  64.26,71.88 90 bottom
U$290  [8_0]  66.8,71.88 90 bottom
U$291  [OSHW-LOGO-S]  60.45,69.98 90 bottom
U$292  [_#RST0]  66.8,64.9 90 bottom
U$293  [_42]  56.64,65.02 90 bottom
U$294  [_53]  59.18,65.02 90 bottom
U$295  [_64]  64.26,65.02 90 bottom
U$296  [_75]  61.72,65.02 90 bottom
U$297  [_GND1]  54.1,64.77 90 bottom
U$298  [00]  91.57,73.66 0 top
U$299  [11]  94.11,73.66 0 top
U$300  [22]  96.65,73.66 0 top
U$301  [33]  99.19,73.66 0 top
U$302  [44]  91.44,66.29 0 top
U$303  [55]  94.11,66.29 0 top
U$304  [66]  99.19,66.29 0 top
U$305  [77]  96.65,66.29 0 top
U$306  [RST8]  101.22,66.29 0 top
U$307  [VCC10]  88.52,73.66 0 top
U$308  [GND9]  88.52,66.29 0 top
U$309  [81]  101.73,73.66 0 top
U$310  [ATTO8411]  105.19,64.24 90 bottom
U$311  [SPARKX-SMALL]  107.44,69.98 90 bottom
U$312  [VCC_5]  89.66,69.98 90 bottom
U$313  [0_4]  92.2,71.88 90 bottom
U$314  [1_3]  94.74,72.14 90 bottom
U$315  [2_2]  97.28,71.88 90 bottom
U$316  [3_1]  99.82,71.88 90 bottom
U$317  [8_0]  102.36,71.88 90 bottom
U$318  [OSHW-LOGO-S]  96.01,69.98 90 bottom
U$319  [_#RST0]  102.36,64.9 90 bottom
U$320  [_42]  92.2,65.02 90 bottom
U$321  [_53]  94.74,65.02 90 bottom
U$322  [_64]  99.82,65.02 90 bottom
U$323  [_75]  97.28,65.02 90 bottom
U$324  [_GND1]  89.66,64.77 90 bottom
U$325  [00]  20.45,88.9 0 top
U$326  [11]  22.99,88.9 0 top
U$327  [22]  25.53,88.9 0 top
U$328  [33]  28.07,88.9 0 top
U$329  [44]  20.32,81.53 0 top
U$330  [55]  22.99,81.53 0 top
U$331  [66]  28.07,81.53 0 top
U$332  [77]  25.53,81.53 0 top
U$333  [RST8]  30.1,81.53 0 top
U$334  [VCC10]  17.4,88.9 0 top
U$335  [GND9]  17.4,81.53 0 top
U$336  [81]  30.61,88.9 0 top
U$337  [ATTO8411]  34.07,79.48 90 bottom
U$338  [SPARKX-SMALL]  36.32,85.22 90 bottom
U$339  [VCC_5]  18.54,85.22 90 bottom
U$340  [0_4]  21.08,87.12 90 bottom
U$341  [1_3]  23.62,87.38 90 bottom
U$342  [2_2]  26.16,87.12 90 bottom
U$343  [3_1]  28.7,87.12 90 bottom
U$344  [8_0]  31.24,87.12 90 bottom
U$345  [OSHW-LOGO-S]  24.89,85.22 90 bottom
U$346  [_#RST0]  31.24,80.14 90 bottom
U$347  [_42]  21.08,80.26 90 bottom
U$348  [_53]  23.62,80.26 90 bottom
U$349  [_64]  28.7,80.26 90 bottom
U$350  [_75]  26.16,80.26 90 bottom
U$351  [_GND1]  18.54,80.01 90 bottom
U$352  [00]  56.01,88.9 0 top
U$353  [11]  58.55,88.9 0 top
U$354  [22]  61.09,88.9 0 top
U$355  [33]  63.63,88.9 0 top
U$356  [44]  55.88,81.53 0 top
U$357  [55]  58.55,81.53 0 top
U$358  [66]  63.63,81.53 0 top
U$359  [77]  61.09,81.53 0 top
U$360  [RST8]  65.66,81.53 0 top
U$361  [VCC10]  52.96,88.9 0 top
U$362  [GND9]  52.96,81.53 0 top
U$363  [81]  66.17,88.9 0 top
U$364  [ATTO8411]  69.63,79.48 90 bottom
U$365  [SPARKX-SMALL]  71.88,85.22 90 bottom
U$366  [VCC_5]  54.1,85.22 90 bottom
U$367  [0_4]  56.64,87.12 90 bottom
U$368  [1_3]  59.18,87.38 90 bottom
U$369  [2_2]  61.72,87.12 90 bottom
U$370  [3_1]  64.26,87.12 90 bottom
U$371  [8_0]  66.8,87.12 90 bottom
U$372  [OSHW-LOGO-S]  60.45,85.22 90 bottom
U$373  [_#RST0]  66.8,80.14 90 bottom
U$374  [_42]  56.64,80.26 90 bottom
U$375  [_53]  59.18,80.26 90 bottom
U$376  [_64]  64.26,80.26 90 bottom
U$377  [_75]  61.72,80.26 90 bottom
U$378  [_GND1]  54.1,80.01 90 bottom
U$379  [00]  91.57,88.9 0 top
U$380  [11]  94.11,88.9 0 top
U$381  [22]  96.65,88.9 0 top
U$382  [33]  99.19,88.9 0 top
U$383  [44]  91.44,81.53 0 top
U$384  [55]  94.11,81.53 0 top
U$385  [66]  99.19,81.53 0 top
U$386  [77]  96.65,81.53 0 top
U$387  [RST8]  101.22,81.53 0 top
U$388  [VCC10]  88.52,88.9 0 top
U$389  [GND9]  88.52,81.53 0 top
U$390  [81]  101.73,88.9 0 top
U$391  [ATTO8411]  105.19,79.48 90 bottom
U$392  [SPARKX-SMALL]  107.44,85.22 90 bottom
U$393  [VCC_5]  89.66,85.22 90 bottom
U$394  [0_4]  92.2,87.12 90 bottom
U$395  [1_3]  94.74,87.38 90 bottom
U$396  [2_2]  97.28,87.12 90 bottom
U$397  [3_1]  99.82,87.12 90 bottom
U$398  [8_0]  102.36,87.12 90 bottom
U$399  [OSHW-LOGO-S]  96.01,85.22 90 bottom
U$400  [_#RST0]  102.36,80.14 90 bottom
U$401  [_42]  92.2,80.26 90 bottom
U$402  [_53]  94.74,80.26 90 bottom
U$403  [_64]  99.82,80.26 90 bottom
U$404  [_75]  97.28,80.26 90 bottom
U$405  [_GND1]  89.66,80.01 90 bottom

## Library data of the parts
C1-C15 = SparkFun-Capacitors; PROD_ID: CAP-00810
D1 D2 D4 D5 D7 D8 D10 D11 D13 D14 D16 D17 D19 D20 D22 D23 D25 D26 D28 D29 D31 D32 D34 D35 D37 D38 D40 D41 D43 D44 = SparkFun-DiscreteSemi; PROD_ID: DIO-08199
D3 D6 D9 D12 D15 D18 D21 D24 D27 D30 D33 D36 D39 D42 D45 = SparkFun-LED; PROD_ID: DIO-08575
E$1-E$4 FD1-FD30 U$27 U$48 U$75 U$102 U$129 U$156 U$183 U$210 U$237 U$264 U$291 U$318 U$345 U$372 U$399 = SparkFun-Aesthetics
E$5 E$6 = SparkFun-Retired
J1 J6 J11 J16 J21 J26 J31 J36 J41 J46 J51 J56 J61 J66 J71 = SparkFun-Connectors; PROD_ID: CONN-13711
J2-J5 J7-J10 J12-J15 J17-J20 J22-J25 J27-J30 J32-J35 J37-J40 J42-J45 J47-J50 J52-J55 J57-J60 J62-J65 J67-J70 J72-J75 = SparkFun-Connectors
R1 R2 R7 R8 R13 R14 R19 R20 R25 R26 R31 R32 R37 R38 R43 R44 R49 R50 R55 R56 R61 R62 R67 R68 R73 R74 R79 R80 R85 R86 = SparkFun-Resistors
R3 R9 R15 R21 R27 R33 R39 R45 R51 R57 R63 R69 R75 R81 R87 = SparkFun-Resistors; PROD_ID: RES-08306
R4 R10 R16 R22 R28 R34 R40 R46 R52 R58 R64 R70 R76 R82 R88 = SparkFun-Resistors; PROD_ID: RES-07868
R5 R11 R17 R23 R29 R35 R41 R47 R53 R59 R65 R71 R77 R83 R89 = SparkFun-Resistors; PROD_ID: RES-00824
R6 R12 R18 R24 R30 R36 R42 R48 R54 R60 R66 R72 R78 R84 R90 = SparkFun-Resistors; PROD_ID: RES-07856
S1-S15 = SparkFun-Switches; PROD_ID: SWCH-00815; SF_SKU: COM-08229
U1-U15 = SparkFun-IC-Microcontroller
U$1-U$11 U$13 U$28-U$38 U$40 U$55-U$65 U$67 U$82-U$92 U$94 U$109-U$119 U$121 U$136-U$146 U$148 U$163-U$173 U$175 U$190-U$200 U$202 U$217-U$227 U$229 U$244-U$254 U$256 U$271-U$281 U$283 U$298-U$308 U$310 U$325-U$335 U$337 U$352-U$362 U$364 U$379-U$389 U$391 = buzzard_labels (20)
U$12 U$39 U$66 U$93 U$120 U$147 U$174 U$201 U$228 U$255 U$282 U$309 U$336 U$363 U$390 = buzzard_labels (21)
U$14 U$41 U$68 U$95 U$122 U$149 U$176 U$203 U$230 U$257 U$284 U$311 U$338 U$365 U$392 = SparkX
U$15-U$20 U$49-U$54 U$76-U$81 U$103-U$108 U$130-U$135 U$157-U$162 U$184-U$189 U$211-U$216 U$238-U$243 U$265-U$270 U$292-U$297 U$319-U$324 U$346-U$351 U$373-U$378 U$400-U$405 = buzzard_labels (23)
U$21-U$26 U$42-U$47 U$69-U$74 U$96-U$101 U$123-U$128 U$150-U$155 U$177-U$182 U$204-U$209 U$231-U$236 U$258-U$263 U$285-U$290 U$312-U$317 U$339-U$344 U$366-U$371 U$393-U$398 = buzzard_labels (22)

## Nets
!RESET: J4.1 R5.2 S1.1 U1.13
!RESET1: J9.1 R11.2 S2.1 U2.13
!RESET2: J14.1 R17.2 S3.1 U3.13
!RESET3: J19.1 R23.2 S4.1 U4.13
!RESET4: J24.1 R29.2 S5.1 U5.13
!RESET5: J29.1 R35.2 S6.1 U6.13
!RESET6: J34.1 R41.2 S7.1 U7.13
!RESET7: J39.1 R47.2 S8.1 U8.13
!RESET8: J44.1 R53.2 S9.1 U9.13
!RESET9: J49.1 R59.2 S10.1 U10.13
!RESET10: J54.1 R65.2 S11.1 U11.13
!RESET11: J59.1 R71.2 S12.1 U12.13
!RESET12: J64.1 R77.2 S13.1 U13.13
!RESET13: J69.1 R83.2 S14.1 U14.13
!RESET14: J74.1 R89.2 S15.1 U15.13
D0: J3.2 U1.5
D1: J3.3 U1.4
D2: J3.4 U1.3
D3: J3.5 U1.2
D4: J2.4 U1.1
D5: J2.3 U1.20
D6: J2.1 U1.16
D7: J2.2 U1.15
D8: J8.2 U2.5
D9: J8.3 U2.4
D10: J8.4 U2.3
D11: J8.5 U2.2
D12: J7.4 U2.1
D13: J7.3 U2.20
D14: J7.1 U2.16
D15: J7.2 U2.15
D16: J13.2 U3.5
D17: J13.3 U3.4
D18: J13.4 U3.3
D19: J13.5 U3.2
D20: J12.4 U3.1
D21: J12.3 U3.20
D22: J12.1 U3.16
D23: J12.2 U3.15
D24: J18.2 U4.5
D25: J18.3 U4.4
D26: J18.4 U4.3
D27: J18.5 U4.2
D28: J17.4 U4.1
D29: J17.3 U4.20
D30: J17.1 U4.16
D31: J17.2 U4.15
D32: J23.2 U5.5
D33: J23.3 U5.4
D34: J23.4 U5.3
D35: J23.5 U5.2
D36: J22.4 U5.1
D37: J22.3 U5.20
D38: J22.1 U5.16
D39: J22.2 U5.15
D40: J28.2 U6.5
D41: J28.3 U6.4
D42: J28.4 U6.3
D43: J28.5 U6.2
D44: J27.4 U6.1
D45: J27.3 U6.20
D46: J27.1 U6.16
D47: J27.2 U6.15
D48: J33.2 U7.5
D49: J33.3 U7.4
D50: J33.4 U7.3
D51: J33.5 U7.2
D52: J32.4 U7.1
D53: J32.3 U7.20
D54: J32.1 U7.16
D55: J32.2 U7.15
D56: J38.2 U8.5
D57: J38.3 U8.4
D58: J38.4 U8.3
D59: J38.5 U8.2
D60: J37.4 U8.1
D61: J37.3 U8.20
D62: J37.1 U8.16
D63: J37.2 U8.15
D64: J43.2 U9.5
D65: J43.3 U9.4
D66: J43.4 U9.3
D67: J43.5 U9.2
D68: J42.4 U9.1
D69: J42.3 U9.20
D70: J42.1 U9.16
D71: J42.2 U9.15
D72: J48.2 U10.5
D73: J48.3 U10.4
D74: J48.4 U10.3
D75: J48.5 U10.2
D76: J47.4 U10.1
D77: J47.3 U10.20
D78: J47.1 U10.16
D79: J47.2 U10.15
D80: J53.2 U11.5
D81: J53.3 U11.4
D82: J53.4 U11.3
D83: J53.5 U11.2
D84: J52.4 U11.1
D85: J52.3 U11.20
D86: J52.1 U11.16
D87: J52.2 U11.15
D88: J58.2 U12.5
D89: J58.3 U12.4
D90: J58.4 U12.3
D91: J58.5 U12.2
D92: J57.4 U12.1
D93: J57.3 U12.20
D94: J57.1 U12.16
D95: J57.2 U12.15
D96: J63.2 U13.5
D97: J63.3 U13.4
D98: J63.4 U13.3
D99: J63.5 U13.2
D100: J62.4 U13.1
D101: J62.3 U13.20
D102: J62.1 U13.16
D103: J62.2 U13.15
D104: J68.2 U14.5
D105: J68.3 U14.4
D106: J68.4 U14.3
D107: J68.5 U14.2
D108: J67.4 U14.1
D109: J67.3 U14.20
D110: J67.1 U14.16
D111: J67.2 U14.15
D112: J73.2 U15.5
D113: J73.3 U15.4
D114: J73.4 U15.3
D115: J73.5 U15.2
D116: J72.4 U15.1
D117: J72.3 U15.20
D118: J72.1 U15.16
D119: J72.2 U15.15
D+: D1.C J1.D+ R2.1 R4.2
D+1: D4.C J6.D+ R8.1 R10.2
D+2: D7.C J11.D+ R14.1 R16.2
D+3: D10.C J16.D+ R20.1 R22.2
D+4: D13.C J21.D+ R26.1 R28.2
D+5: D16.C J26.D+ R32.1 R34.2
D+6: D19.C J31.D+ R38.1 R40.2
D+7: D22.C J36.D+ R44.1 R46.2
D+8: D25.C J41.D+ R50.1 R52.2
D+9: D28.C J46.D+ R56.1 R58.2
D+10: D31.C J51.D+ R62.1 R64.2
D+11: D34.C J56.D+ R68.1 R70.2
D+12: D37.C J61.D+ R74.1 R76.2
D+13: D40.C J66.D+ R80.1 R82.2
D+14: D43.C J71.D+ R86.1 R88.2
D-: D2.C J1.D- R1.1 R3.1
D-1: D5.C J6.D- R7.1 R9.1
D-2: D8.C J11.D- R13.1 R15.1
D-3: D11.C J16.D- R19.1 R21.1
D-4: D14.C J21.D- R25.1 R27.1
D-5: D17.C J26.D- R31.1 R33.1
D-6: D20.C J31.D- R37.1 R39.1
D-7: D23.C J36.D- R43.1 R45.1
D-8: D26.C J41.D- R49.1 R51.1
D-9: D29.C J46.D- R55.1 R57.1
D-10: D32.C J51.D- R61.1 R63.1
D-11: D35.C J56.D- R67.1 R69.1
D-12: D38.C J61.D- R73.1 R75.1
D-13: D41.C J66.D- R79.1 R81.1
D-14: D44.C J71.D- R85.1 R87.1
GND: C1.2 D1.A D2.A D3.C J1.GND J2.5 R4.1 S1.2 U1.8
GND1: C2.2 D4.A D5.A D6.C J6.GND J7.5 R10.1 S2.2 U2.8
GND2: C3.2 D7.A D8.A D9.C J11.GND J12.5 R16.1 S3.2 U3.8
GND3: C4.2 D10.A D11.A D12.C J16.GND J17.5 R22.1 S4.2 U4.8
GND4: C5.2 D13.A D14.A D15.C J21.GND J22.5 R28.1 S5.2 U5.8
GND5: C6.2 D16.A D17.A D18.C J26.GND J27.5 R34.1 S6.2 U6.8
GND6: C7.2 D19.A D20.A D21.C J31.GND J32.5 R40.1 S7.2 U7.8
GND7: C8.2 D22.A D23.A D24.C J36.GND J37.5 R46.1 S8.2 U8.8
GND8: C9.2 D25.A D26.A D27.C J41.GND J42.5 R52.1 S9.2 U9.8
GND9: C10.2 D28.A D29.A D30.C J46.GND J47.5 R58.1 S10.2 U10.8
GND10: C11.2 D31.A D32.A D33.C J51.GND J52.5 R64.1 S11.2 U11.8
GND11: C12.2 D34.A D35.A D36.C J56.GND J57.5 R70.1 S12.2 U12.8
GND12: C13.2 D37.A D38.A D39.C J61.GND J62.5 R76.1 S13.2 U13.8
GND13: C14.2 D40.A D41.A D42.C J66.GND J67.5 R82.1 S14.2 U14.8
GND14: C15.2 D43.A D44.A D45.C J71.GND J72.5 R88.1 S15.2 U15.8
N$1: D6.A R12.1
N$2: D9.A R18.1
N$3: D3.A R6.1
N$4: D12.A R24.1
N$5: D15.A R30.1
N$6: D18.A R36.1
N$7: D21.A R42.1
N$8: D24.A R48.1
N$9: D27.A R54.1
N$10: D30.A R60.1
N$11: D33.A R66.1
N$12: D36.A R72.1
N$13: D39.A R78.1
N$14: D42.A R84.1
N$15: D45.A R90.1
PB0: R1.2 U1.11
PB1: R2.2 U1.12
PB2: R7.2 U2.11
PB3: R8.2 U2.12
PB4: R13.2 U3.11
PB5: R14.2 U3.12
PB6: R19.2 U4.11
PB7: R20.2 U4.12
PB8: R25.2 U5.11
PB9: R26.2 U5.12
PB10: R31.2 U6.11
PB11: R32.2 U6.12
PB12: R37.2 U7.11
PB13: R38.2 U7.12
PB14: R43.2 U8.11
PB15: R44.2 U8.12
PB16: R49.2 U9.11
PB17: R50.2 U9.12
PB18: R55.2 U10.11
PB19: R56.2 U10.12
PB20: R61.2 U11.11
PB21: R62.2 U11.12
PB22: R67.2 U12.11
PB23: R68.2 U12.12
PB24: R73.2 U13.11
PB25: R74.2 U13.12
PB26: R79.2 U14.11
PB27: R80.2 U14.12
PB28: R85.2 U15.11
PB29: R86.2 U15.12
SHLD: J1.SHIELD J1.SHIELD2 J1.SHIELD3 J1.SHIELD4 J1.SHIELD5 J1.SHIELD6 J1.SHIELD7 J1.SHIELD8 J1.SHIELD9 J1.SHIELD10
SHLD1: J6.SHIELD J6.SHIELD2 J6.SHIELD3 J6.SHIELD4 J6.SHIELD5 J6.SHIELD6 J6.SHIELD7 J6.SHIELD8 J6.SHIELD9 J6.SHIELD10
SHLD2: J11.SHIELD J11.SHIELD2 J11.SHIELD3 J11.SHIELD4 J11.SHIELD5 J11.SHIELD6 J11.SHIELD7 J11.SHIELD8 J11.SHIELD9 J11.SHIELD10
SHLD3: J16.SHIELD J16.SHIELD2 J16.SHIELD3 J16.SHIELD4 J16.SHIELD5 J16.SHIELD6 J16.SHIELD7 J16.SHIELD8 J16.SHIELD9 J16.SHIELD10
SHLD4: J21.SHIELD J21.SHIELD2 J21.SHIELD3 J21.SHIELD4 J21.SHIELD5 J21.SHIELD6 J21.SHIELD7 J21.SHIELD8 J21.SHIELD9 J21.SHIELD10
SHLD5: J26.SHIELD J26.SHIELD2 J26.SHIELD3 J26.SHIELD4 J26.SHIELD5 J26.SHIELD6 J26.SHIELD7 J26.SHIELD8 J26.SHIELD9 J26.SHIELD10
SHLD6: J31.SHIELD J31.SHIELD2 J31.SHIELD3 J31.SHIELD4 J31.SHIELD5 J31.SHIELD6 J31.SHIELD7 J31.SHIELD8 J31.SHIELD9 J31.SHIELD10
SHLD7: J36.SHIELD J36.SHIELD2 J36.SHIELD3 J36.SHIELD4 J36.SHIELD5 J36.SHIELD6 J36.SHIELD7 J36.SHIELD8 J36.SHIELD9 J36.SHIELD10
SHLD8: J41.SHIELD J41.SHIELD2 J41.SHIELD3 J41.SHIELD4 J41.SHIELD5 J41.SHIELD6 J41.SHIELD7 J41.SHIELD8 J41.SHIELD9 J41.SHIELD10
SHLD9: J46.SHIELD J46.SHIELD2 J46.SHIELD3 J46.SHIELD4 J46.SHIELD5 J46.SHIELD6 J46.SHIELD7 J46.SHIELD8 J46.SHIELD9 J46.SHIELD10
SHLD10: J51.SHIELD J51.SHIELD2 J51.SHIELD3 J51.SHIELD4 J51.SHIELD5 J51.SHIELD6 J51.SHIELD7 J51.SHIELD8 J51.SHIELD9 J51.SHIELD10
SHLD11: J56.SHIELD J56.SHIELD2 J56.SHIELD3 J56.SHIELD4 J56.SHIELD5 J56.SHIELD6 J56.SHIELD7 J56.SHIELD8 J56.SHIELD9 J56.SHIELD10
SHLD12: J61.SHIELD J61.SHIELD2 J61.SHIELD3 J61.SHIELD4 J61.SHIELD5 J61.SHIELD6 J61.SHIELD7 J61.SHIELD8 J61.SHIELD9 J61.SHIELD10
SHLD13: J66.SHIELD J66.SHIELD2 J66.SHIELD3 J66.SHIELD4 J66.SHIELD5 J66.SHIELD6 J66.SHIELD7 J66.SHIELD8 J66.SHIELD9 J66.SHIELD10
SHLD14: J71.SHIELD J71.SHIELD2 J71.SHIELD3 J71.SHIELD4 J71.SHIELD5 J71.SHIELD6 J71.SHIELD7 J71.SHIELD8 J71.SHIELD9 J71.SHIELD10
STATUS: J5.1 R6.2 U1.14
STATUS1: J10.1 R12.2 U2.14
STATUS2: J15.1 R18.2 U3.14
STATUS3: J20.1 R24.2 U4.14
STATUS4: J25.1 R30.2 U5.14
STATUS5: J30.1 R36.2 U6.14
STATUS6: J35.1 R42.2 U7.14
STATUS7: J40.1 R48.2 U8.14
STATUS8: J45.1 R54.2 U9.14
STATUS9: J50.1 R60.2 U10.14
STATUS10: J55.1 R66.2 U11.14
STATUS11: J60.1 R72.2 U12.14
STATUS12: J65.1 R78.2 U13.14
STATUS13: J70.1 R84.2 U14.14
STATUS14: J75.1 R90.2 U15.14
VCC: C1.1 J1.VBUS J3.1 R3.2 R5.1 U1.9
VCC1: C2.1 J6.VBUS J8.1 R9.2 R11.1 U2.9
VCC2: C3.1 J11.VBUS J13.1 R15.2 R17.1 U3.9
VCC3: C4.1 J16.VBUS J18.1 R21.2 R23.1 U4.9
VCC4: C5.1 J21.VBUS J23.1 R27.2 R29.1 U5.9
VCC5: C6.1 J26.VBUS J28.1 R33.2 R35.1 U6.9
VCC6: C7.1 J31.VBUS J33.1 R39.2 R41.1 U7.9
VCC7: C8.1 J36.VBUS J38.1 R45.2 R47.1 U8.9
VCC8: C9.1 J41.VBUS J43.1 R51.2 R53.1 U9.9
VCC9: C10.1 J46.VBUS J48.1 R57.2 R59.1 U10.9
VCC10: C11.1 J51.VBUS J53.1 R63.2 R65.1 U11.9
VCC11: C12.1 J56.VBUS J58.1 R69.2 R71.1 U12.9
VCC12: C13.1 J61.VBUS J63.1 R75.2 R77.1 U13.9
VCC13: C14.1 J66.VBUS J68.1 R81.2 R83.1 U14.9
VCC14: C15.1 J71.VBUS J73.1 R87.2 R89.1 U15.9